# Allegro board STABILIZATOR.brd
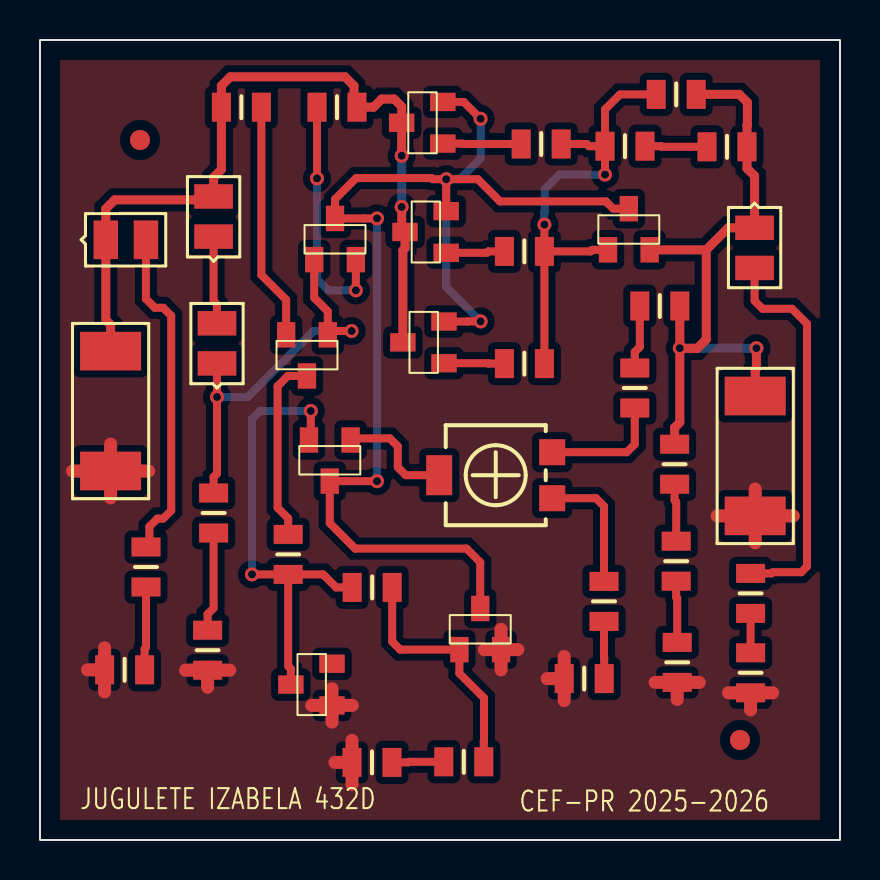
[diagram p0: board, top side]
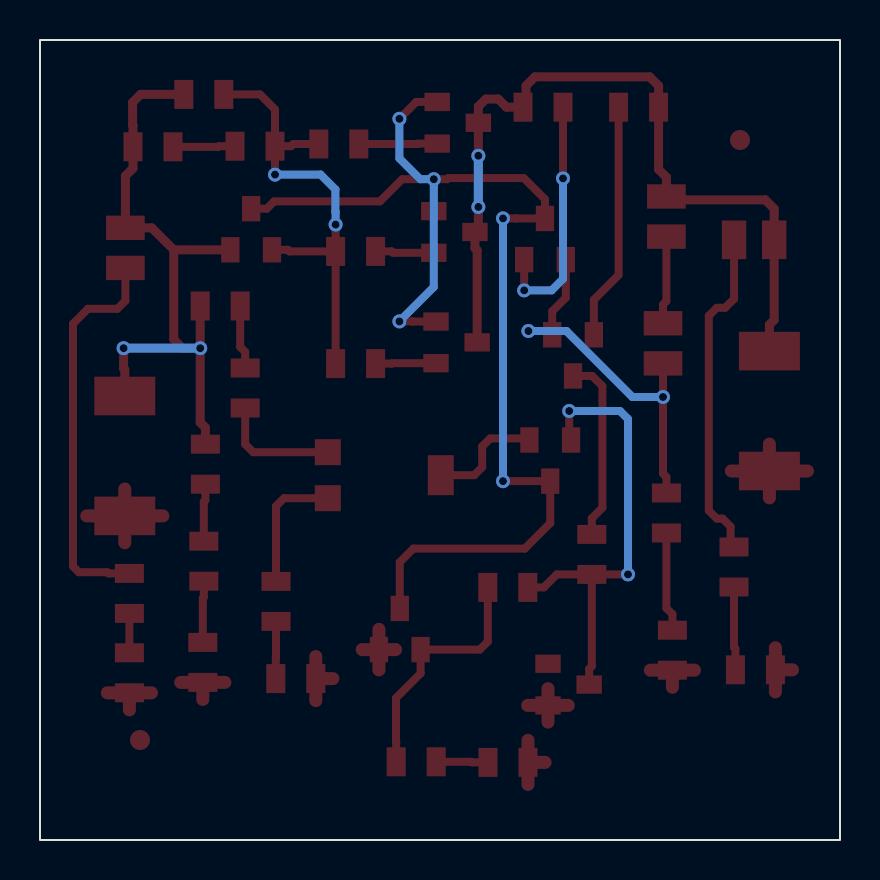
[diagram p1: board, bottom side, seen from below]

Outline 40 x 40 mm; copper layers: TOP, BOTTOM. Coordinates in mm from the lower left corner of the outline.
Outline path: rectangle 0,0 40,40

## Design rules (mm)
nets with their own width: min track width 0.4; nets N000361 N00562 N00566 N00573 N00579 N00603 N00660 N00749 N00783 N00805 N00866 N00903 N00907 N003761 N05027 N05204 N11106 N11110 N11368 N11596 N14815 N20567 N259560 N260280 N260860 N264191
nets with their own width: min track width 0.45; nets VIN VOUT
nets with their own width: min track width 0.65; nets GND

## Placement (name value [footprint] x y rotation side)
D1  BZX84-C6V2  [TO236AA]  14.6 6.73 0 top
D3  5V,LED,LED  [SMD0805]  3.29 30.01 0 top
D4  5V,LED,LED  [SMD0805]  35.73 30.61 270 top
J1  CON2  [SMR2512]  3.53 18.45 90 top
J2  CON2  [SMR2512]  35.76 22.2 270 top
NOREF  -  [unnamed]  5 35 0 top
NOREF#2  -  [unnamed]  35 5 0 top
Q1  QBC856B  [TO236AA]  14.39 25.26 90 top
Q2  QBC856B  [TO236AA]  13.71 29.02 270 top
Q3  QBC846B  [TO236AA]  20.14 34.82 0 top
Q4  QBC846B  [TO236AA]  28.4 29.51 270 top
Q5  QBC846B  [TO236AA]  15.53 20 90 top
Q6  QBC846B  [TO236AA]  20.97 9.52 270 top
Q7  QBC846B  [TO236AA]  20.31 29.36 0 top
Q8  QBC846B  [TO236AA]  20.2 23.84 0 top
R1  510  [RES2012X50N_0805]  31.73 18.79 90 top
R2  330  [RES2012X50N_0805]  31.81 13.94 90 top
R3  10  [RES2012X50N_0805]  31.86 8.88 90 top
R6  10K  [TS53YL]  25.61 19.39 0 top
R7  220  [RES2012X50N_0805]  29.74 22.6 90 top
R8  1  [RES2012X50N_0805]  29.25 34.69 180 top
R9  4.7k  [RES2012X50N_0805]  28.2 11.93 90 top
R10  3.3k  [RES2012X50N_0805]  27.21 8.07 0 top
R12  150  [RES2012X50N_0805]  14.85 36.64 0 top
R13  100  [RES2012X50N_0805]  10.07 36.64 180 top
R14  10k  [RES2012X50N_0805]  16.61 12.63 180 top
R15  1k  [RES2012X50N_0805]  21.19 3.91 0 top
R16  2.7k  [RES2012X50N_0805]  8.68 16.35 90 top
R17  510  [RES2012X50N_0805]  8.38 9.49 90 top
R20  10  [RES2012X50N_0805]  31.81 37.28 180 top
R21  1  [RES2012X50N_0805]  34.35 34.66 180 top
R22  1k  [RES2012X50N_0805]  35.53 8.36 90 top
R28  100  [RES2012X50N_0805]  35.53 12.33 90 top
R29  2.7k  [RES2012X50N_0805]  5.3 13.65 90 top
R30  2.7k  [RES2012X50N_0805]  4.23 8.51 0 top
R31  10  [RES2012X50N_0805]  16.6 3.88 0 top
R32  680  [RES2012X50N_0805]  12.41 14.28 90 top
R33  1  [RES2012X50N_0805]  25.06 34.8 180 top
R34  1  [RES2012X50N_0805]  24.22 29.43 180 top
R35  1  [RES2012X50N_0805]  24.22 23.82 180 top
R36  3.3k  [RES2012X50N_0805]  30.99 26.7 0 top
U1  1N4148  [SMD0805]  8.68 30.17 90 top
U2  1N4148  [SMD0805]  8.85 23.83 90 top

## Library data of the parts
D1 = BZX84-C6V2_3
D3 D4 = LED_2
J1 = CON2_0
J2 = CON2
Q1 Q2 = QBC856B_0
Q3 Q7 Q8 = QBC846B
Q4 Q6 = QBC846B_1
Q5 = QBC846B_2
R1-R3 R7-R10 R12-R16 R20-R22 R28-R36 = R
R6 = POT_4
R17 = R_0
U1 U2 = 1N4148_2

## Footprints (pads in the part's own frame, mm; a bottom-side part is the same pattern mirrored in y, then rotated)
RES2012X50N_0805
  rect 0.95x1.45 smd: 1(-1,0) 2(1,0)
SMD0805
  rect 1.219x1.93 smd: A(2.007,0) C(0,0)
SMR2512
  rect 1.93x3.048 smd: 1(0,0) 2(5.994,0)
TO236AA
  rect 1.27x0.914 smd: 1(0,0) 2(0,2.083) 3(-2.057,1.041)
TS53YL
  rect 1.3x1.3 smd: 1(0,0) 3(0,-2.3)
  rect 1.3x2 smd: 2(-5.65,-1.15)
unnamed
  round 1 smd: (0,0)

## Nets
GND: D1.1 J1.1 J2.2 Q6.2(E) R3.1 R10.1 R17.1 R22.1 R30.1 R31.1
VIN: D3.C(2) J1.2 Q3.3 Q7.3 Q8.3 R12.2 R13.2 U1.A
VOUT: D4.C(2) J2.1 Q4.2(E) R1.2 R20.1 R21.1 R36.2
N000361: U1.C(2) U2.A
N00562: Q1.2(E) R13.1
N00566: Q1.1 Q2.1 R16.2 U2.C(2)
N00573: Q1.3 R32.2
N00579: D1.3(K) Q5.2(E) R14.2 R32.1
N00603: Q2.2(E) R12.1
N00660: Q6.1 R14.1 R15.2
N00749: Q2.3 Q3.2 Q4.3 Q5.3 Q6.3 Q7.2 Q8.2
N00783: R15.1 R31.2
N00805: Q5.1 R6.2(WIPER)
N00866: R6.3 R9.2
N00903: R1.1 R2.2
N00907: R2.1 R3.2
N003761: R7.2 R36.1
N05027: Q4.1 R8.2 R20.2 R33.1 R34.1 R35.1
N05204: R8.1 R21.2
N11106: R22.2 R28.1
N11110: D4.A R28.2
N11368: D3.A R29.2
N11596: R29.1 R30.2
N14815: R9.1 R10.2
N20567: R16.1 R17.2
N259560: Q3.1(E) R33.2
N260280: Q7.1(E) R34.2
N260860: Q8.1(E) R35.2
N264191: R6.1 R7.1

Pads without a net: D1 2

## Via types
v1: diameter 0.7, hole 0.4, TOP to BOTTOM, 17 vias

## Routing (per net, layer and track width the routed paths; a pad name or vN(x,y) marks a point on that pad's centre or on a via; arc(x,y) is an arc through that point)
GND: length 38.7
  TOP w0.65: 13.59,6.73 D1.1 ; D1.1 14.6,7.57 ; D1.1 15.61,6.73 ; D1.1 14.6,5.89 ; 15.6,2.78 R31.1 ; R31.1 15.6,4.98 ; R31.1 14.75,3.88 ; J1.1 3.53,19.79 ; J1.1 3.53,17.11 ; J1.1 1.63,18.45 ; J1.1 5.43,18.45 ; J2.2 37.66,16.21 ; J2.2 33.86,16.21 ; J2.2 35.76,17.55 ; J2.2 35.76,14.86 ; 35.53,6.51 R22.1 ; R22.1 34.43,7.36 ; R22.1 36.63,7.36 ; 3.23,7.41 R30.1 ; R30.1 3.23,9.61 ; R30.1 2.38,8.51 ; 8.38,7.64 R17.1 ; R17.1 7.28,8.49 ; R17.1 9.48,8.49 ; 26.21,6.97 R10.1 ; R10.1 26.21,9.17 ; R10.1 25.36,8.07 ; Q6.2 23.89,9.52 ; Q6.2 22.22,9.52 ; Q6.2 23.05,8.51 ; Q6.2 23.05,10.53 ; R3.1 32.96,7.88 ; R3.1 31.86,7.03 ; R3.1 30.76,7.88
VIN: length 41.2
  TOP w0.45: Q8.3 18.14,29.48 18.25,29.59 Q7.3 18.08,30.57 v1(18.08,31.65) ; J1.2 3.53,25.76 3.29,26 D3.C 3.29,31.56 3.74,32.01 8.51,32.01 U1.A 8.68,33.14 9.07,33.53 R13.2 9.07,37.71 9.52,38.16 15.25,38.16 15.7,37.71 15.7,36.79 R12.2 16.68,36.64 17.09,37.05 17.7,37.05 18.08,36.67 Q3.3 v1(18.08,34.21)
  BOTTOM w0.45: v1(18.08,34.21) v1(18.08,31.65)
VOUT: length 34.1
  TOP w0.45: Q4.2 33.31,29.51 ; 33.31,29.51 33.31,25.03 32.86,24.58 32,24.58 v1(31.99,24.59) ; 33.31,29.51 34.41,30.61 D4.C 35.73,33.2 35.35,33.58 R21.1 35.35,35.74 35.37,35.76 35.37,36.88 34.97,37.28 R20.1 ; v1(31.99,24.59) R36.2 ; v1(31.99,24.59) 31.99,20.88 31.73,20.62 R1.2 ; v1(35.82,24.59) 35.82,23.58 35.76,23.52 J2.1
  BOTTOM w0.45: v1(35.82,24.59) v1(31.99,24.59)
N000361: length 4.4
  TOP w0.4: U2.A 8.85,26.77 8.68,26.94 U1.C
N00562: length 11.9
  TOP w0.4: R13.1 11.07,28.25 12.31,27.01 Q1.2
N00566: length 20
  TOP w0.4: U2.C v1(8.85,22.15) 8.85,18.32 8.68,18.15 R16.2 ; Q2.1 13.71,27.11 14.39,26.43 Q1.1 14.58,25.45 v1(15.58,25.45)
  BOTTOM w0.4: v1(8.85,22.15) 10.38,22.15 13.68,25.45 v1(15.58,25.45)
N00573: length 9.3
  TOP w0.4: Q1.3 12.39,23.2 11.88,22.69 11.88,16.61 12.41,16.08 R32.2
N00579: length 23.2
  TOP w0.4: Q5.2 13.54,20.09 v1(13.54,21.45) ; R32.1 14.16,13.28 14.81,12.63 R14.2 ; R32.1 v1(10.6,13.28) ; R32.1 12.41,8.69 12.54,8.56 D1.3
  BOTTOM w0.4: v1(13.54,21.45) 11,21.45 10.6,21.05 v1(10.6,13.28)
N00603: length 12.3
  TOP w0.4: Q2.2 v1(15.79,27.48) ; R12.1 v1(13.85,33.08)
  BOTTOM w0.4: v1(13.85,33.08) 13.85,28.05 14.42,27.48 v1(15.79,27.48)
N00660: length 12.4
  TOP w0.4: R14.1 17.61,9.92 18.01,9.52 Q6.1 20.97,8.33 22.2,7.1 22.2,4.97 22.19,4.96 R15.2
N00749: length 64.7
  TOP w0.4: v1(20.31,33.04) Q7.2 ; v1(20.31,33.04) 19.63,33.04 19.58,33.1 15.81,33.1 14.75,32.04 Q2.3 16.22,31.08 16.22,31.08 v1(16.85,31.08) ; v1(20.31,33.04) 21.89,33.04 23,31.93 28.29,31.93 28.66,31.57 Q4.3 ; Q6.3 22.01,13.89 21.33,14.57 15.76,14.57 14.49,15.84 Q5.3 v1(16.85,17.94) ; Q3.2 21.19,36.9 v1(22.03,36.06) ; Q8.2 21.37,25.92 21.37,25.93 v1(22.03,25.93)
  BOTTOM w0.4: v1(22.03,36.06) 22.03,34.08 20.99,33.04 v1(20.31,33.04) 20.31,27.65 v1(22.03,25.93) ; v1(16.85,17.94) v1(16.85,31.08)
N00783: length 2.6
  TOP w0.4: R31.2 18.4,3.88 18.43,3.91 R15.1
N00805: length 5.8
  TOP w0.4: Q5.1 15.61,20.08 17.49,20.08 17.89,19.68 17.89,18.64 18.29,18.24 R6.2
N00866: length 6.5
  TOP w0.4: R9.2 28.2,16.69 27.8,17.09 R6.3
N00903: length 2.9
  TOP w0.4: R1.1 31.73,16.99 31.81,16.91 R2.2
N00907: length 3.1
  TOP w0.4: R3.2 31.86,12.09 31.81,12.14 R2.1
N003761: length 3.2
  TOP w0.4: R36.1 29.99,24.65 29.74,24.4 R7.2
N05027: length 23.6
  TOP w0.4: R8.2 27.45,34.69 27.34,34.8 R33.1 ; R8.2 28.25,36.53 29,37.28 R20.2 ; R8.2 v1(28.25,33.27) ; Q4.1 27.62,29.51 27.54,29.43 R34.1 ; R34.1 v1(25.22,30.77) ; R34.1 R35.1
  BOTTOM w0.4: v1(28.25,33.27) 25.97,33.27 25.23,32.53 25.23,31.41 25.22,31.4 v1(25.22,30.77)
N05204: length 3.1
  TOP w0.4: R21.2 31.08,34.66 31.05,34.69 R8.1
N11106: length 2
  TOP w0.4: R28.1 R22.2
N11110: length 19.8
  TOP w0.4: R28.2 36.58,13.33 36.64,13.39 38.06,13.39 38.35,13.68 38.35,25.81 37.6,26.56 36.13,26.56 35.73,26.96 D4.A
N11368: length 16.8
  TOP w0.4: D3.A 5.3,27.06 5.74,26.61 6.16,26.61 6.56,26.21 6.56,16.47 6.16,16.07 5.87,16.07 5.47,15.67 5.47,14.82 R29.2
N11596: length 4.2
  TOP w0.4: R29.1 5.3,9.63 5.23,9.56 R30.2
N14815: length 2.9
  TOP w0.4: R10.2 28.21,9.12 28.2,9.13 R9.1
N20567: length 5
  TOP w0.4: R16.1 8.68,11.59 8.38,11.29 R17.2
N259560: length 3.9
  TOP w0.4: Q3.1 21.1,34.82 21.12,34.8 R33.2
N260280: length 2.9
  TOP w0.4: R34.2 22.42,29.43 22.35,29.36 Q7.1
N260860: length 3
  TOP w0.4: Q8.1 22.4,23.84 22.42,23.82 R35.2
N264191: length 6.1
  TOP w0.4: R6.1 29.34,19.39 29.74,19.79 R7.1

## Copper pours and planes (outline as drawn; the poured copper is in the pictures)
GND on TOP: 1,1 1,39 39,39 39,1

## Text on the board
Ref Des/Silkscreen Top: JUGULETE IZABELA 432D | CEF-PR 2025-2026
XSECTION_CHART: *  SURFACE | L1 TOP CONDUCTOR | *  DIELECTRIC | L2 BOTTOM CONDUCTOR | DESIGN CROSS SECTION CHART | ___________________________ | TOTAL THICKNESS 1.6 MM | 1-2
DISPLAY_TOP: FIGURE | FINISHED_SIZE | 0.4 | DRILL CHART: TOP to BOTTOM | ALL UNITS ARE IN MILLIMETERS | PLATED | QTY | 17
